# Altium PCB carrier_board.PcbDoc (part 18 of 18)
Units mm, origin at the board's own origin, x right, y up, seen from the top; angles counter-clockwise.
Board outline 146 x 102 mm, 20 copper layers (F.Cu, F.Mask, B.Cu, B.Mask, In1.Cu, F.SilkS, In2.Cu, B.SilkS, F.Adhes, B.Adhes, F.Paste, B.Paste, Dwgs.User, Cmts.User, Eco1.User, Eco2.User, Edge.Cuts, Margin, B.CrtYd, F.CrtYd); 256 components, 384 nets, 1262 pads, 1024 vias.
Unrouted connection lines stored in the file: 117.
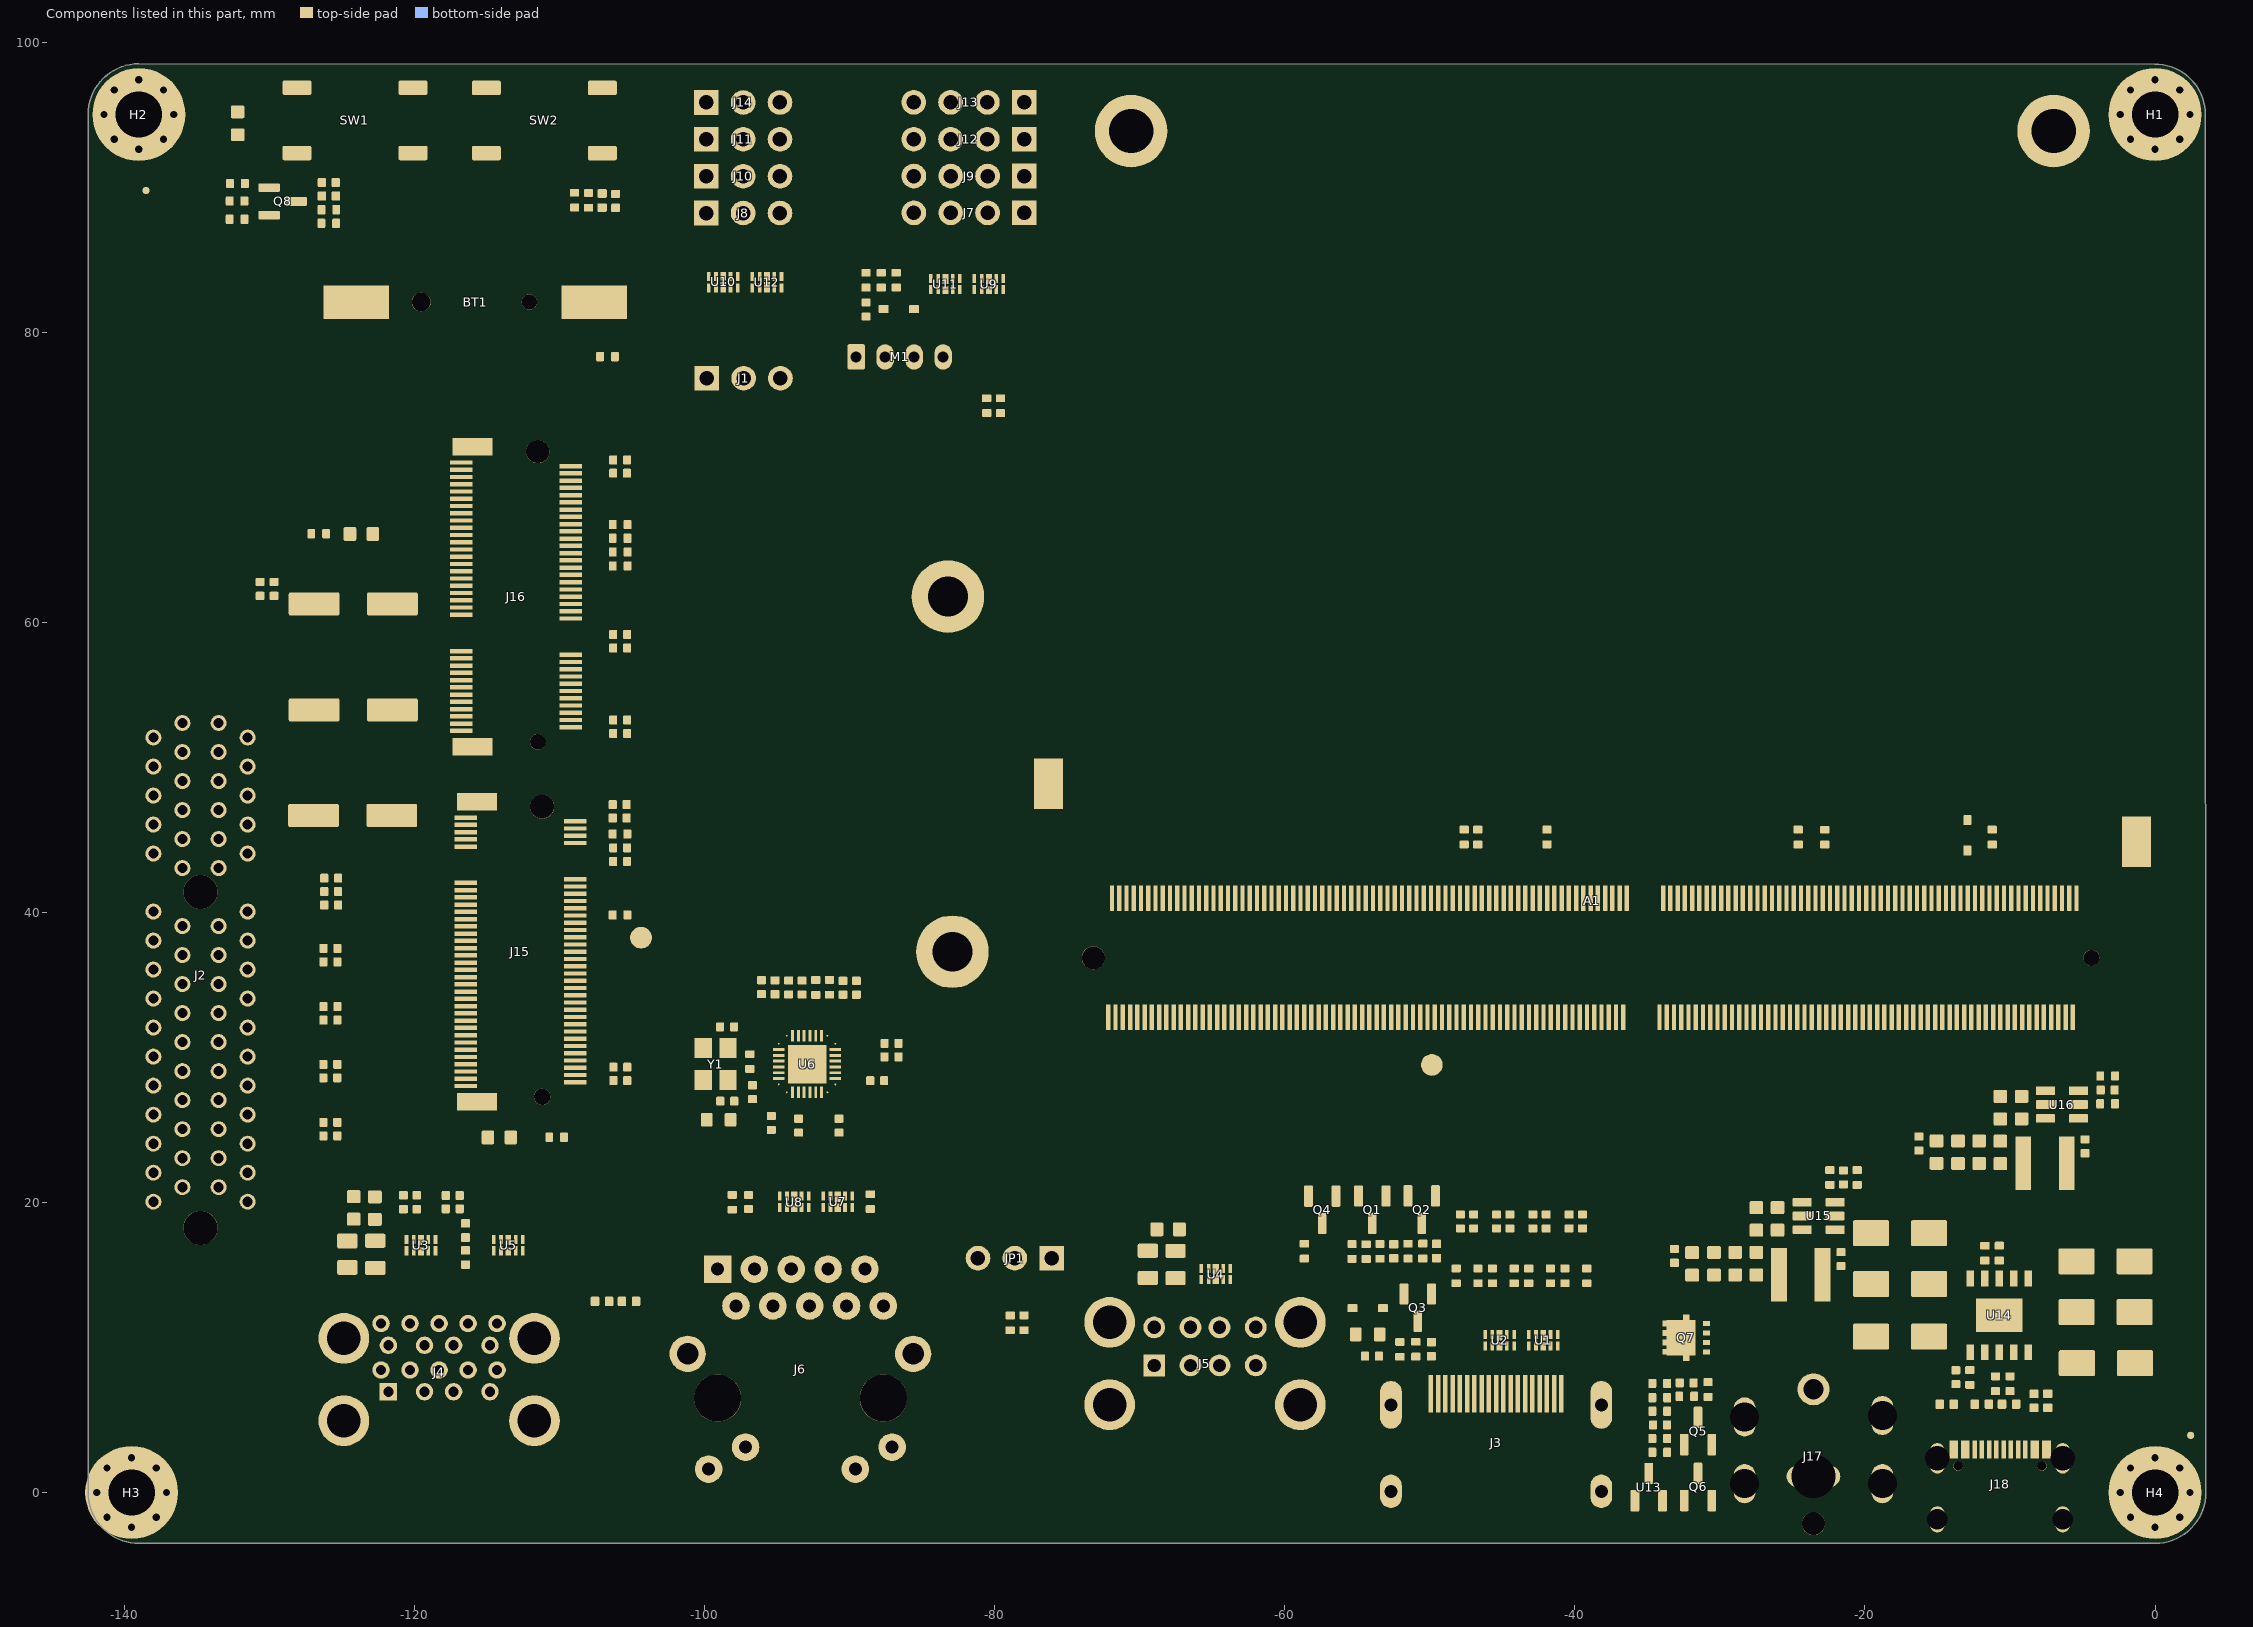
[diagram p28: the components of this part, seen from the top]

## Polygon pours and split planes (outlines as drawn) (continued)
I2C2_SCL on B.Cu "B.Cu-/GPIO/I2C2_SCL" (solid, remove dead copper, pour order 31001): 21 vertices, not listed, extent -79.167,89.503 -77.589,91.104
DDI_B_HPD on B.Cu "B.Cu-/HDMI/DDI_B_HPD" (solid, remove dead copper, pour order 31082): -27.336,30.705 -27.256,30.701 -27.198,30.689 -27.136,30.664 -27.072,30.639 -26.979,30.614 -26.939,30.81 -26.979,31.006 -27.114,30.965 -27.136,30.956 -27.215,30.927 -27.336,30.915
Net-(A1-{\B\I\O\S\_\S\E\L\}\)\ on B.Cu "B.Cu-Net-(A1-~{BIOS_SEL})-1" (solid, remove dead copper, pour order 31097): -39.786,38.78 -39.708,38.775 -39.652,38.763 -39.587,38.737 -39.523,38.709 -39.429,38.684 -39.389,38.88 -39.429,39.076 -39.561,39.035 -39.587,39.023 -39.666,38.993 -39.786,38.98
HSIO_8_RX- on B.Cu "B.Cu-/LattePanda Module/HSIO_8_RX-" (solid, remove dead copper, pour order 31247): -61.944,36.027 -61.939,36.078 -61.926,36.115 -61.882,36.161 -61.857,36.178 -61.803,36.216 -61.748,36.279 -61.914,36.391 -62.11,36.429 -62.126,36.324 -62.128,36.25 -62.123,36.189 -62.114,36.027
{\C\L\K\R\E\Q\E\}\ on B.Cu "B.Cu-/M.2 E&M Key/~{CLKREQE}" (solid, remove dead copper, pour order 31115): -107.431,64.079 -107.379,64.021 -107.348,63.972 -107.321,63.908 -107.295,63.844 -107.246,63.759 -107.079,63.869 -106.969,64.036 -107.091,64.101 -107.118,64.111 -107.196,64.145 -107.289,64.221
I2C3_SCL on B.Cu "B.Cu-/GPIO/I2C3_SCL" (solid, remove dead copper, pour order 31365): -82.975,85.066 -82.98,84.998 -82.992,84.947 -83.03,84.873 -83.066,84.808 -83.096,84.709 -82.9,84.669 -82.704,84.709 -82.743,84.825 -82.77,84.873 -82.809,84.948 -82.821,84.999 -82.825,85.066
Net-(A1-{\B\I\O\S\_\S\E\L\}\)\ on B.Cu "B.Cu-Net-(A1-~{BIOS_SEL})" (solid, remove dead copper, pour order 31019): 21 vertices, not listed, extent -40.601,38.256 -39.39,39.504
HSIO_9_TX- on B.Cu "B.Cu-/LattePanda Module/HSIO_9_TX-" (solid, remove dead copper, pour order 31289): -120.237,28.313 -120.399,28.322 -120.498,28.328 -120.639,28.309 -120.601,28.113 -120.489,27.947 -120.417,28.013 -120.388,28.056 -120.364,28.09 -120.336,28.118 -120.296,28.136 -120.237,28.143
CC2 on B.Cu "B.Cu-/PSU/CC2" (solid, remove dead copper, pour order 31076): -8.738,6.219 -8.809,6.154 -8.865,6.116 -8.911,6.092 -9.041,6.016 -8.931,5.849 -8.764,5.739 -8.688,5.869 -8.644,5.946 -8.561,6.042
+12VA on B.Cu "B.Cu-+12VA" (solid, remove dead copper, pour order 30973): 19 vertices, not listed, extent -139.075,50.502 -125.112,62.082
GND on B.Cu "B.Cu-GND-1" (solid, remove dead copper, pour order 30957): -142.44,-3.53 -37.274,-3.494 -37.187,23.421 -20.213,23.467 -13.337,31.018 3.497,30.97 3.49,98.5 -142.5,98.5
+5V on B.Cu "B.Cu-+5V" (solid, remove dead copper, pour order 30967): -70.57,16.98 -71.58,17.01 -71.59,15.46 -70.52,15.45 -70.52,16.145 -68.525,16.145 -68.525,17.93 -69.62,17.93
GND on B.Cu "B.Cu-GND" (solid, remove dead copper, pour order 30951): 3.566,32.271 -20.243,32.287 -20.281,23.019 -38.352,23.048 -38.566,-3.426 3.49,-3.49
PWR_EN on In2.Cu "In2.Cu-/PSU/PWR_EN-5" (solid, remove dead copper, pour order 31057): -77.9,6.964 -77.895,7.042 -77.883,7.098 -77.857,7.163 -77.829,7.227 -77.804,7.321 -78,7.361 -78.196,7.321 -78.155,7.189 -78.143,7.163 -78.113,7.084 -78.1,6.964
I2C2_SCL on In2.Cu "In2.Cu-/GPIO/I2C2_SCL-1" (solid, remove dead copper, pour order 31135): -58.383,77.577 -58.338,77.525 -58.311,77.481 -58.285,77.402 -58.265,77.33 -58.216,77.239 -58.049,77.349 -57.939,77.516 -58.049,77.571 -58.102,77.585 -58.182,77.612 -58.226,77.639 -58.277,77.683
SOC_UART2_TX on In2.Cu "In2.Cu-/GPIO/SOC_UART2_TX-1" (solid, remove dead copper, pour order 31165): -94.803,81.825 -94.848,81.876 -94.876,81.921 -94.901,82 -94.922,82.071 -94.97,82.163 -95.137,82.052 -95.247,81.885 -95.138,81.831 -95.084,81.816 -95.004,81.79 -94.96,81.763 -94.909,81.718
Net-(A1-{\B\I\O\S\_\S\E\L\}\)\ on In2.Cu "In2.Cu-Net-(A1-~{BIOS_SEL})-1" (solid, remove dead copper, pour order 31027): -39.741,39.089 -39.689,39.031 -39.658,38.982 -39.631,38.918 -39.605,38.854 -39.556,38.769 -39.389,38.879 -39.279,39.046 -39.401,39.111 -39.428,39.121 -39.506,39.155 -39.599,39.231
Net-(A1-SIO_UART_RX) on In2.Cu "In2.Cu-Net-(A1-SIO_UART_RX)-1" (solid, remove dead copper, pour order 31042): -88.837,62.544 -88.841,62.466 -88.854,62.41 -88.88,62.346 -88.907,62.281 -88.933,62.187 -88.737,62.147 -88.541,62.187 -88.581,62.319 -88.594,62.346 -88.624,62.424 -88.637,62.544
VPullup on In2.Cu "In2.Cu-VPullup-1" (solid, remove dead copper, pour order 31012): -28.246,46.28 -28.168,46.275 -28.112,46.263 -28.047,46.237 -27.983,46.209 -27.889,46.184 -27.849,46.38 -27.889,46.576 -28.021,46.535 -28.047,46.523 -28.126,46.493 -28.246,46.48
LED1_1000 on In2.Cu "In2.Cu-/Gigabit Ethernet/LED1_1000-1" (solid, remove dead copper, pour order 30994): 25 vertices, not listed, extent -100.78,1.425 -99.53,2.675
PWR_EN on In2.Cu "In2.Cu-/PSU/PWR_EN-4" (solid, remove dead copper, pour order 31006): -32.846,0.73 -32.768,0.725 -32.712,0.713 -32.647,0.687 -32.583,0.659 -32.489,0.634 -32.449,0.83 -32.489,1.026 -32.621,0.985 -32.647,0.973 -32.726,0.943 -32.846,0.93
FAN_1_TAC on In2.Cu "In2.Cu-/Fan_Temp/FAN_1_TAC-1" (solid, remove dead copper, pour order 31087): -70.861,43.111 -70.919,43.059 -70.968,43.028 -71.032,43.001 -71.096,42.975 -71.181,42.926 -71.071,42.759 -70.904,42.649 -70.839,42.771 -70.829,42.798 -70.795,42.876 -70.719,42.969
+3V3 on In2.Cu "In2.Cu-+3V3-10" (solid, remove dead copper, pour order 31030): -88.931,27.752 -88.879,27.694 -88.848,27.645 -88.821,27.581 -88.795,27.516 -88.746,27.432 -88.579,27.542 -88.469,27.709 -88.591,27.773 -88.618,27.784 -88.696,27.818 -88.789,27.894
SOC_UART1_TX on In2.Cu "In2.Cu-/GPIO/SOC_UART1_TX-1" (solid, remove dead copper, pour order 31126): -60.483,74.837 -60.438,74.785 -60.411,74.741 -60.385,74.662 -60.365,74.59 -60.316,74.499 -60.149,74.609 -60.039,74.776 -60.149,74.831 -60.202,74.845 -60.282,74.872 -60.326,74.899 -60.377,74.943
PWR_EN on In2.Cu "In2.Cu-/PSU/PWR_EN-3" (solid, remove dead copper, pour order 31084): -32.241,1.181 -32.299,1.129 -32.348,1.098 -32.412,1.071 -32.476,1.045 -32.561,0.996 -32.451,0.829 -32.284,0.719 -32.219,0.841 -32.209,0.868 -32.175,0.946 -32.099,1.039
SUSCLK_WIFI on In2.Cu "In2.Cu-/LattePanda Module/SUSCLK_WIFI-5" (solid, remove dead copper, pour order 31009): -74.846,48.51 -74.768,48.505 -74.712,48.493 -74.647,48.467 -74.583,48.439 -74.489,48.414 -74.449,48.61 -74.489,48.806 -74.621,48.765 -74.647,48.753 -74.726,48.723 -74.846,48.71
I2C3_SCL on In2.Cu "In2.Cu-/GPIO/I2C3_SCL-1" (solid, remove dead copper, pour order 31129): -59.413,76.887 -59.368,76.835 -59.341,76.791 -59.315,76.712 -59.295,76.64 -59.246,76.549 -59.079,76.659 -58.969,76.826 -59.079,76.881 -59.132,76.895 -59.212,76.922 -59.256,76.949 -59.307,76.993
{\P\L\T\_\R\S\T\}\ on In2.Cu "In2.Cu-/~{PLT_RST}-5" (solid, remove dead copper, pour order 31192): -91.955,33.771 -92.007,33.713 -92.038,33.664 -92.063,33.605 -92.089,33.543 -92.136,33.461 -91.971,33.349 -91.774,33.389 -91.806,33.468 -91.842,33.518 -91.868,33.554 -91.883,33.588 -91.879,33.624 -91.849,33.665
+3V3 on In2.Cu "In2.Cu-+3V3-9" (solid, remove dead copper, pour order 31015): -97.266,24.39 -97.188,24.385 -97.132,24.373 -97.067,24.347 -97.003,24.319 -96.909,24.294 -96.869,24.49 -96.909,24.686 -97.041,24.645 -97.067,24.633 -97.146,24.603 -97.266,24.59
{\P\L\T\_\R\S\T\}\ on In2.Cu "In2.Cu-/~{PLT_RST}-4" (solid, remove dead copper, pour order 31120): -51.553,29.717 -51.508,29.665 -51.481,29.621 -51.455,29.542 -51.435,29.47 -51.386,29.379 -51.219,29.489 -51.109,29.656 -51.219,29.711 -51.272,29.725 -51.352,29.752 -51.396,29.779 -51.447,29.823
+3V3 on In2.Cu "In2.Cu-+3V3-8" (solid, remove dead copper, pour order 31096): -51.149,15.411 -51.201,15.469 -51.232,15.518 -51.259,15.582 -51.285,15.646 -51.334,15.731 -51.501,15.621 -51.611,15.454 -51.489,15.389 -51.462,15.379 -51.384,15.345 -51.291,15.269
{\W\A\K\E\}\ on In2.Cu "In2.Cu-/~{WAKE}-3" (solid, remove dead copper, pour order 31090): -59.449,42.351 -59.501,42.409 -59.532,42.458 -59.559,42.522 -59.585,42.586 -59.634,42.671 -59.801,42.561 -59.911,42.394 -59.789,42.329 -59.762,42.319 -59.684,42.285 -59.591,42.209
I2C3_SCL on In2.Cu "In2.Cu-/GPIO/I2C3_SCL" (solid, remove dead copper, pour order 31162): -82.567,81.813 -82.612,81.865 -82.639,81.909 -82.665,81.988 -82.685,82.06 -82.734,82.151 -82.901,82.041 -83.011,81.874 -82.901,81.819 -82.848,81.805 -82.768,81.778 -82.724,81.751 -82.673,81.707
{\W\A\K\E\}\ on In2.Cu "In2.Cu-/~{WAKE}-2" (solid, remove dead copper, pour order 31075): -46.461,34.921 -46.519,34.869 -46.568,34.838 -46.632,34.811 -46.696,34.785 -46.781,34.736 -46.671,34.569 -46.504,34.459 -46.439,34.581 -46.429,34.608 -46.395,34.686 -46.319,34.779
LED2_ACT on In2.Cu "In2.Cu-/Gigabit Ethernet/LED2_ACT-1" (solid, remove dead copper, pour order 30997): 25 vertices, not listed, extent -90.395,1.609 -88.815,3.042
{\P\W\R\_\L\E\D\}\{\s\l\a\s\h\}\{PSON} on In2.Cu "In2.Cu-/~{PWR_LED}{slash}~{PSON}-3" (solid, remove dead copper, pour order 30986): 20 vertices, not listed, extent -76.422,14.886 -74.796,16.512
VPullup on In2.Cu "In2.Cu-VPullup" (solid, remove dead copper, pour order 31078): -40.631,45.041 -40.689,44.989 -40.738,44.958 -40.802,44.931 -40.866,44.905 -40.951,44.856 -40.841,44.689 -40.674,44.579 -40.609,44.701 -40.599,44.728 -40.565,44.806 -40.489,44.899
I2C4_SCL on In2.Cu "In2.Cu-/GPIO/I2C4_SCL-1" (solid, remove dead copper, pour order 31123): -60.343,76.237 -60.298,76.185 -60.271,76.141 -60.245,76.062 -60.225,75.99 -60.176,75.899 -60.009,76.009 -59.899,76.176 -60.009,76.231 -60.062,76.245 -60.142,76.272 -60.186,76.299 -60.237,76.343
{\P\L\T\_\R\S\T\}\ on In2.Cu "In2.Cu-/~{PLT_RST}-3" (solid, remove dead copper, pour order 31066): -112.029,63.909 -111.971,63.961 -111.922,63.992 -111.858,64.019 -111.794,64.045 -111.709,64.094 -111.819,64.261 -111.986,64.371 -112.051,64.249 -112.061,64.222 -112.095,64.144 -112.171,64.051
SOC_UART2_TX on In2.Cu "In2.Cu-/GPIO/SOC_UART2_TX" (solid, remove dead copper, pour order 31111): -91.561,78.37 -91.513,78.316 -91.484,78.269 -91.458,78.197 -91.435,78.128 -91.386,78.039 -91.219,78.149 -91.109,78.316 -91.166,78.349 -91.215,78.368 -91.277,78.383 -91.359,78.406 -91.403,78.432 -91.454,78.476
SOC_UART1_TX on In2.Cu "In2.Cu-/GPIO/SOC_UART1_TX" (solid, remove dead copper, pour order 31117): -95.842,81.908 -95.888,81.96 -95.915,82.005 -95.941,82.083 -95.962,82.154 -96.011,82.244 -96.178,82.134 -96.288,81.967 -96.179,81.913 -96.124,81.898 -96.043,81.873 -95.999,81.846 -95.948,81.802
FAN_1_TAC on In2.Cu "In2.Cu-/Fan_Temp/FAN_1_TAC" (solid, remove dead copper, pour order 31093): -76.609,74.891 -76.661,74.949 -76.692,74.998 -76.719,75.062 -76.745,75.126 -76.794,75.211 -76.961,75.101 -77.071,74.934 -76.949,74.869 -76.922,74.859 -76.844,74.825 -76.751,74.749
SUSCLK_WIFI on In2.Cu "In2.Cu-/LattePanda Module/SUSCLK_WIFI-4" (solid, remove dead copper, pour order 31099): -102.219,64.711 -102.271,64.769 -102.302,64.818 -102.329,64.882 -102.355,64.946 -102.404,65.031 -102.571,64.921 -102.681,64.754 -102.559,64.689 -102.532,64.679 -102.454,64.645 -102.361,64.569
GND on In2.Cu "In2.Cu-GND-1" (solid, remove dead copper, pour order 31003): 19 vertices, not listed, extent -119.374,7.862 -118.299,8.949
{\P\L\T\_\R\S\T\}\ on In2.Cu "In2.Cu-/~{PLT_RST}-2" (solid, remove dead copper, pour order 31153): -111.007,40.973 -111.052,41.025 -111.079,41.069 -111.105,41.148 -111.125,41.22 -111.174,41.311 -111.341,41.201 -111.451,41.034 -111.341,40.979 -111.288,40.965 -111.208,40.938 -111.164,40.911 -111.113,40.867
{\P\L\T\_\R\S\T\}\ on In2.Cu "In2.Cu-/~{PLT_RST}-1" (solid, remove dead copper, pour order 31174): -91.574,33.425 -91.642,33.43 -91.693,33.442 -91.767,33.48 -91.832,33.516 -91.931,33.546 -91.971,33.35 -91.931,33.154 -91.815,33.193 -91.767,33.22 -91.692,33.259 -91.641,33.271 -91.574,33.275
Net-(A1-SIO_UART_RX) on In2.Cu "In2.Cu-Net-(A1-SIO_UART_RX)" (solid, remove dead copper, pour order 31000): 22 vertices, not listed, extent -98.017,75.486 -96.603,76.821
+3V3 on In2.Cu "In2.Cu-+3V3-7" (solid, remove dead copper, pour order 31039): -49.985,13.046 -49.99,12.968 -50.002,12.912 -50.028,12.847 -50.056,12.783 -50.081,12.689 -49.885,12.649 -49.689,12.689 -49.73,12.821 -49.742,12.847 -49.772,12.926 -49.785,13.046
+3V3 on In2.Cu "In2.Cu-+3V3-6" (solid, remove dead copper, pour order 30979): -128.57,43.76 -138.68,43.74 -138.67,46.93 -124.45,46.93 -124.47,65.44 -118.39,65.46 -118.39,63.32 -121.5,63.39 -121.57,43.82
SOC_UART1_RX on In2.Cu "In2.Cu-/GPIO/SOC_UART1_RX-1" (solid, remove dead copper, pour order 31141): -63.246,76.075 -63.178,76.07 -63.127,76.058 -63.053,76.02 -62.988,75.984 -62.889,75.954 -62.849,76.15 -62.889,76.346 -63.005,76.307 -63.053,76.28 -63.128,76.241 -63.179,76.229 -63.246,76.225
LED1_1000 on In2.Cu "In2.Cu-/Gigabit Ethernet/LED1_1000" (solid, remove dead copper, pour order 31156): -95.417,30.073 -95.462,30.125 -95.489,30.169 -95.515,30.248 -95.535,30.32 -95.584,30.411 -95.751,30.301 -95.861,30.134 -95.751,30.079 -95.698,30.065 -95.618,30.038 -95.574,30.011 -95.523,29.967
PWR_EN on In2.Cu "In2.Cu-/PSU/PWR_EN-2" (solid, remove dead copper, pour order 31036): -24.48,21.456 -24.485,21.378 -24.497,21.322 -24.523,21.257 -24.551,21.193 -24.576,21.099 -24.38,21.059 -24.184,21.099 -24.225,21.231 -24.237,21.257 -24.267,21.336 -24.28,21.456
+3V3 on In2.Cu "In2.Cu-+3V3-5" (solid, remove dead copper, pour order 31054): -49.785,12.254 -49.78,12.332 -49.768,12.388 -49.742,12.453 -49.714,12.517 -49.689,12.611 -49.885,12.651 -50.081,12.611 -50.04,12.479 -50.028,12.453 -49.998,12.374 -49.985,12.254
SOC_UART0_TX on In2.Cu "In2.Cu-/GPIO/SOC_UART0_TX-1" (solid, remove dead copper, pour order 31114): -96.397,81.433 -96.439,81.482 -96.465,81.525 -96.488,81.611 -96.506,81.687 -96.554,81.781 -96.721,81.671 -96.831,81.504 -96.715,81.444 -96.675,81.431 -96.597,81.401 -96.503,81.327
SOC_UART0_TX on In2.Cu "In2.Cu-/GPIO/SOC_UART0_TX" (solid, remove dead copper, pour order 31138): -65.026,76.555 -64.958,76.55 -64.907,76.538 -64.833,76.5 -64.768,76.464 -64.669,76.434 -64.629,76.63 -64.669,76.826 -64.785,76.787 -64.833,76.76 -64.908,76.721 -64.959,76.709 -65.026,76.705
SUSCLK_WIFI on In2.Cu "In2.Cu-/LattePanda Module/SUSCLK_WIFI-3" (solid, remove dead copper, pour order 31186): -104.251,46.36 -104.341,46.261 -104.397,46.199 -104.491,46.126 -104.381,45.959 -104.184,45.921 -104.175,46.033 -104.176,46.048 -104.17,46.13 -104.15,46.171 -104.11,46.219
{\R\S\T\_\S\W\}\ on In2.Cu "In2.Cu-/LattePanda Module/~{RST_SW}-1" (solid, remove dead copper, pour order 31168): -71.696,35.214 -71.7,35.146 -71.713,35.095 -71.75,35.021 -71.786,34.956 -71.817,34.857 -71.621,34.817 -71.424,34.857 -71.463,34.974 -71.491,35.021 -71.529,35.097 -71.541,35.147 -71.546,35.214
SUSCLK_WIFI on In2.Cu "In2.Cu-/LattePanda Module/SUSCLK_WIFI-2" (solid, remove dead copper, pour order 31105): -58.619,42.921 -58.671,42.979 -58.702,43.028 -58.729,43.092 -58.755,43.156 -58.804,43.241 -58.971,43.131 -59.081,42.964 -58.959,42.899 -58.932,42.889 -58.854,42.855 -58.761,42.779
LED2_ACT on In2.Cu "In2.Cu-/Gigabit Ethernet/LED2_ACT" (solid, remove dead copper, pour order 31189): -95.737,30.8 -95.819,30.805 -95.877,30.817 -95.938,30.841 -96.002,30.866 -96.095,30.89 -96.135,30.694 -96.023,30.528 -95.95,30.58 -95.864,30.633 -95.812,30.646 -95.737,30.65
{\P\W\R\_\L\E\D\}\{\s\l\a\s\h\}\{PSON} on In2.Cu "In2.Cu-/~{PWR_LED}{slash}~{PSON}-2" (solid, remove dead copper, pour order 31183): -70.45,35.172 -70.455,35.125 -70.468,35.09 -70.511,35.049 -70.544,35.031 -70.606,34.995 -70.666,34.931 -70.5,34.819 -70.304,34.781 -70.288,34.884 -70.286,34.957 -70.291,35.015 -70.3,35.172
{\P\L\T\_\R\S\T\}\ on In2.Cu "In2.Cu-/~{PLT_RST}" (solid, remove dead copper, pour order 31024): -111.691,41.409 -111.639,41.351 -111.608,41.302 -111.581,41.238 -111.555,41.174 -111.506,41.089 -111.339,41.199 -111.229,41.366 -111.351,41.431 -111.378,41.441 -111.456,41.475 -111.549,41.551
Net-(A1-{\B\I\O\S\_\S\E\L\}\)\ on In2.Cu "In2.Cu-Net-(A1-~{BIOS_SEL})" (solid, remove dead copper, pour order 31051): -41.82,42.474 -41.815,42.552 -41.803,42.608 -41.777,42.673 -41.749,42.737 -41.724,42.831 -41.92,42.871 -42.116,42.831 -42.075,42.699 -42.063,42.673 -42.033,42.594 -42.02,42.474
Net-(A1-SIO_UART_TX) on In2.Cu "In2.Cu-Net-(A1-SIO_UART_TX)-1" (solid, remove dead copper, pour order 30991): 20 vertices, not listed, extent -100.202,75.546 -98.576,77.172
+3V3 on In2.Cu "In2.Cu-+3V3-4" (solid, remove dead copper, pour order 31081): -51.461,10.103 -51.519,10.052 -51.568,10.02 -51.632,9.993 -51.696,9.967 -51.781,9.919 -51.671,9.752 -51.504,9.641 -51.439,9.763 -51.429,9.791 -51.395,9.868 -51.319,9.962
FAN_1_PWM on In2.Cu "In2.Cu-/Fan_Temp/FAN_1_PWM-1" (solid, remove dead copper, pour order 31102): -78.099,74.201 -78.151,74.259 -78.182,74.308 -78.209,74.372 -78.235,74.436 -78.284,74.521 -78.451,74.411 -78.561,74.244 -78.439,74.179 -78.412,74.169 -78.334,74.135 -78.241,74.059
SOC_UART1_RX on In2.Cu "In2.Cu-/GPIO/SOC_UART1_RX" (solid, remove dead copper, pour order 31180): -98.814,82.165 -98.882,82.17 -98.933,82.182 -99.007,82.22 -99.072,82.256 -99.171,82.286 -99.211,82.09 -99.171,81.894 -99.055,81.933 -99.007,81.96 -98.932,81.999 -98.881,82.011 -98.814,82.015
Net-(A1-SIO_UART_TX) on In2.Cu "In2.Cu-Net-(A1-SIO_UART_TX)" (solid, remove dead copper, pour order 31033): -89.35,63.156 -89.355,63.078 -89.367,63.022 -89.393,62.957 -89.421,62.893 -89.446,62.799 -89.25,62.759 -89.054,62.799 -89.095,62.931 -89.107,62.957 -89.137,63.036 -89.15,63.156
SUSCLK_WIFI on In2.Cu "In2.Cu-/LattePanda Module/SUSCLK_WIFI-1" (solid, remove dead copper, pour order 31021): -40.021,37.929 -39.969,37.871 -39.938,37.822 -39.911,37.758 -39.885,37.694 -39.836,37.609 -39.669,37.719 -39.559,37.886 -39.681,37.951 -39.708,37.961 -39.786,37.995 -39.879,38.071
SUSCLK_WIFI on In2.Cu "In2.Cu-/LattePanda Module/SUSCLK_WIFI" (solid, remove dead copper, pour order 31063): -80.754,48.71 -80.832,48.715 -80.888,48.727 -80.953,48.753 -81.017,48.781 -81.111,48.806 -81.151,48.61 -81.111,48.414 -80.979,48.455 -80.953,48.467 -80.874,48.497 -80.754,48.51
+3V3 on In2.Cu "In2.Cu-+3V3-3" (solid, remove dead copper, pour order 31060): -105.404,24.59 -105.482,24.595 -105.538,24.607 -105.603,24.633 -105.667,24.661 -105.761,24.686 -105.801,24.49 -105.761,24.294 -105.629,24.335 -105.603,24.347 -105.524,24.377 -105.404,24.39
{\R\S\T\_\S\W\}\ on In2.Cu "In2.Cu-/LattePanda Module/~{RST_SW}" (solid, remove dead copper, pour order 31147): -103.105,81.694 -103.1,81.762 -103.088,81.813 -103.05,81.887 -103.014,81.952 -102.984,82.051 -103.18,82.091 -103.376,82.051 -103.337,81.935 -103.31,81.887 -103.271,81.812 -103.259,81.761 -103.255,81.694
SOC_UART0_RX on In2.Cu "In2.Cu-/GPIO/SOC_UART0_RX-1" (solid, remove dead copper, pour order 31159): -99.907,81.983 -99.952,82.035 -99.979,82.079 -100.005,82.158 -100.025,82.23 -100.074,82.321 -100.241,82.211 -100.351,82.044 -100.241,81.989 -100.188,81.975 -100.108,81.948 -100.064,81.921 -100.013,81.877
I2C2_SCL on In2.Cu "In2.Cu-/GPIO/I2C2_SCL" (solid, remove dead copper, pour order 31177): -81.724,82.125 -81.792,82.13 -81.843,82.142 -81.917,82.18 -81.982,82.216 -82.081,82.246 -82.121,82.05 -82.081,81.854 -81.965,81.893 -81.917,81.92 -81.842,81.959 -81.791,81.971 -81.724,81.975
{\P\W\R\_\L\E\D\}\{\s\l\a\s\h\}\{PSON} on In2.Cu "In2.Cu-/~{PWR_LED}{slash}~{PSON}-1" (solid, remove dead copper, pour order 31150): -71.067,71.643 -71.112,71.695 -71.139,71.739 -71.165,71.818 -71.185,71.89 -71.234,71.981 -71.401,71.871 -71.511,71.704 -71.401,71.649 -71.348,71.635 -71.268,71.608 -71.224,71.581 -71.173,71.537
FAN_1_PWM on In2.Cu "In2.Cu-/Fan_Temp/FAN_1_PWM" (solid, remove dead copper, pour order 31045): -71.26,43.946 -71.265,43.868 -71.277,43.812 -71.303,43.747 -71.331,43.683 -71.356,43.589 -71.16,43.549 -70.964,43.589 -71.005,43.721 -71.017,43.747 -71.047,43.826 -71.06,43.946
{\W\A\K\E\}\ on In2.Cu "In2.Cu-/~{WAKE}-1" (solid, remove dead copper, pour order 31108): -103.36,42.384 -103.365,42.339 -103.378,42.307 -103.421,42.27 -103.454,42.255 -103.516,42.222 -103.576,42.161 -103.41,42.049 -103.214,42.011 -103.188,42.131 -103.167,42.236 -103.16,42.384
{\W\A\K\E\}\ on In2.Cu "In2.Cu-/~{WAKE}" (solid, remove dead copper, pour order 31069): -74.609,47.379 -74.551,47.431 -74.502,47.462 -74.438,47.489 -74.374,47.515 -74.289,47.564 -74.399,47.731 -74.566,47.841 -74.631,47.719 -74.641,47.692 -74.675,47.614 -74.751,47.521
PWR_EN on In2.Cu "In2.Cu-/PSU/PWR_EN-1" (solid, remove dead copper, pour order 31018): -7.936,28.63 -7.858,28.625 -7.802,28.613 -7.737,28.587 -7.673,28.559 -7.579,28.534 -7.539,28.73 -7.579,28.926 -7.711,28.885 -7.737,28.873 -7.816,28.843 -7.936,28.83
{\P\W\R\_\S\W\}\ on In2.Cu "In2.Cu-/LattePanda Module/~{PWR_SW}" (solid, remove dead copper, pour order 31171): -123.164,88.505 -123.232,88.51 -123.283,88.522 -123.357,88.56 -123.422,88.596 -123.521,88.626 -123.561,88.43 -123.521,88.234 -123.405,88.273 -123.357,88.3 -123.282,88.339 -123.231,88.351 -123.164,88.355
SOC_UART0_RX on In2.Cu "In2.Cu-/GPIO/SOC_UART0_RX" (solid, remove dead copper, pour order 31132): -63.173,72.707 -63.128,72.655 -63.101,72.611 -63.075,72.532 -63.055,72.46 -63.006,72.369 -62.839,72.479 -62.729,72.646 -62.839,72.701 -62.892,72.715 -62.972,72.742 -63.016,72.769 -63.067,72.813
I2C4_SCL on In2.Cu "In2.Cu-/GPIO/I2C4_SCL" (solid, remove dead copper, pour order 31144): -83.825,81.664 -83.82,81.732 -83.808,81.783 -83.77,81.857 -83.734,81.922 -83.704,82.021 -83.9,82.061 -84.096,82.021 -84.057,81.905 -84.03,81.857 -83.991,81.782 -83.979,81.731 -83.975,81.664
{\P\W\R\_\L\E\D\}\{\s\l\a\s\h\}\{PSON} on In2.Cu "In2.Cu-/~{PWR_LED}{slash}~{PSON}" (solid, remove dead copper, pour order 31072): -58.844,15.199 -58.786,15.251 -58.737,15.282 -58.673,15.309 -58.609,15.335 -58.524,15.384 -58.634,15.551 -58.801,15.661 -58.866,15.539 -58.876,15.512 -58.91,15.434 -58.986,15.341
PWR_EN on In2.Cu "In2.Cu-/PSU/PWR_EN" (solid, remove dead copper, pour order 31048): -24.28,20.664 -24.275,20.742 -24.263,20.798 -24.237,20.863 -24.209,20.927 -24.184,21.021 -24.38,21.061 -24.576,21.021 -24.535,20.889 -24.523,20.863 -24.493,20.784 -24.48,20.664
GND on In2.Cu "In2.Cu-GND" (solid, remove dead copper, pour order 32166): -142.495,-3.491 3.445,-3.461 3.435,98.539 -142.555,98.539
+3V3 on In2.Cu "In2.Cu-+3V3-2" (solid, remove dead copper, pour order 30977): -121.67,65.46 -118.39,65.46 -118.39,63.32 -121.67,63.32
+3V3 on In2.Cu "In2.Cu-+3V3-1" (solid, remove dead copper, pour order 30982): -91.19,38.73 -91.19,37.73 -92.19,37.73 -92.19,38.73
+3V3 on In2.Cu "In2.Cu-+3V3" (solid, remove dead copper, pour order 30981): -105.59,38.54 -105.59,37.54 -106.59,37.54 -106.59,38.54
GND on In1.Cu "In1.Cu-GND-2" (solid, remove dead copper, pour order 32165): -142.495,-3.491 3.445,-3.461 3.435,98.539 -142.555,98.539
GND on In1.Cu "In1.Cu-GND-1" (solid, remove dead copper, pour order 30990): -117.429,8.913 -117.486,8.862 -117.54,8.829 -117.585,8.812 -117.628,8.806 -117.714,8.823 -117.853,8.896 -117.999,8.977 -118.085,9.012 -118.183,9.038 -118.301,8.449 -117.801,8.117 -117.701,8.269 -117.534,8.506 -117.287,8.771
GND on In1.Cu "In1.Cu-GND" (solid, remove dead copper, pour order 30985): 20 vertices, not listed, extent -118.301,7.862 -117.254,8.949

## Keep-outs
F.Cu:
  region: -37.074,23.267 -37.127,10.197 -40.188,4.967 -40.254,23.301
  region: -118.75,40.06 -118.84,25.15 -121.82,21.8 -129.52,21.81 -129.53,18.1 -135.14,18.07 -139.33,18.07 -139.08,40.07
  region: -15.157,28.203 -20.321,22.445 -23.152,22.454 -15.165,32.76
B.Cu:
  region: -121.88,26.37 -123.56,26.37 -128.83,21.28 -134.7,21.27 -134.7,37.12 -121.86,37.12

## Other copper
F.SilkS:
  text "3V3" at -105.85,94.212 h1.5
  text "3V3" at -91.2,94.182 h1.5
  text "RST" at -116.123,92.48 h1.5 r90
  text "PWR" at -129.018,92.1 h1.5 r90
  text "GND" at -105.97,91.673 h1.5
  text "GND" at -91.55,91.653 h1.5
  text "SCL" at -91.4,89.303 h1.5
  text "TX" at -105.03,89.234 h1.5
  text "RX" at -104.98,86.734 h1.5
  text "SDA" at -91.44,86.743 h1.5
  text "2" at -78.85,84.489 h1.5
  text "5" at -86.51,84.456 h1.5
  text "4" at -83.89,84.449 h1.5
  text "3" at -81.24,84.442 h1.5
  text "1" at -98.11,84.294 h1.5
  text "0" at -100.74,84.282 h1.5
  text "2" at -95.45,84.289 h1.5
  text "RX" at -98.63,78.363 h1
  text "TX" at -101.12,78.343 h1
  text "GND" at -96.33,78.305 h1
  text "CR1220" at -126.801,77.42 h1.5 r90
  text "CPU_FAN" at -89.88,73.347 h1
  text "Debug_Uart" at -101.99,73.201 h1
  text "LatttePanda Mu" at -47.94,72.696 h1.5
  text "PCIe PWR" at -128.62,66.754 h1
  text "M.2 E KEY" at -102.77,60.114 h1.5
  text "PCIe Slot is Only  / Available When Using  / 12V DC Power Input." at -129.845,57.26 h1.5 r90
  text "M.2 M KEY" at -102.57,37.204 h1.5
  text "Primer Carrier for LattePanda Mu V1.0" at -84.59,23.568 h2
  text "SSD" at -115.74,21.755 h1
  text "~{SLP}" at -82.6,17.721 h1
  text "~{PSON}" at -78.57,17.711 h1
  text "PWR_EN" at -81.67,12.721 h1
  text "PCIe x4" at -139.85,12.351 h1.5
  text "USB2.0" at -74.311,-2.52 h1.5 r90
  text "ETH" at -103.264,-2.89 h1.5 r90
  text "HDMI" at -54.134,-2.9 h1.5 r90
  text "PD 15V" at -3.006,-2.99 h1.5 r90
  text "12V" at -15.534,-3.03 h1.5 r90
  text "USB3.0" at -127.681,-3.08 h1.5 r90
B.SilkS:
  text "100" at -132.61,-3.205 h1

## Silkscreen, mask and mechanical layers (free items; w line width, h text height)
User.5:
  text "FAN_TAC" at -87.92,80.824 h0.8
  text "FAN_PWM" at -72.25,75.106 h0.8
  text "VPULL" at -8.06,47.215 h0.8
  text "BIOSSEL" at -38.34,36.322 h0.8
  text "3V3" at -16.67,25.462 h0.8
  text "12VA" at -33.64,21.553 h0.8
  text "5V" at -36.39,14.324 h0.8
  text "12V" at -24.96,9.333 h0.8
  text "VDC" at 2.74,4.422 h0.8
  text "PWR_EN" at -75.63,3.117 h0.8
  text "15V" at -2.91,2.364 h0.8
User.4:
  text "PLT_RST" at -52.35,27.054 h0.8
User.2:
  text "PCB INF: DFR1142 V1.0.0 1.6mm 20240313 HDJ-CD / Top SolderMask:Black  Bottom SolderMask:Black / Top Silkscreen:White   Bottom Silkscreen:White" at -28.191,-19.478 h2
User.1:
  text "PCB INF: DFR1142 V1.0.0 1.6mm 20240313 HDJ-CD / Top SolderMask:Black  Bottom SolderMask:Black / Top Silkscreen:White   Bottom Silkscreen:White" at -109.371,-19.478 h2

## Dimensions
-142.5,95 to 3.475,94.975 on User.3
-139,95 to -139,0 on User.3
-139,95 to -0.025,94.975 on User.3
-139,98.5 to -139,-3.5 on User.3

## Text inside footprints (layer, text, board x,y; h text height)
A1: Cmts.User "M2x5.5 SMT nuts x2" at -13.79,86.574 h1
J3: Dwgs.User "PCB Edge" at -46.548,-2.578 h1